# Altium PCB Arduino_DUE_V02b_Template.PcbDoc
Units mil, origin at the board's own origin, x right, y up, seen from the top; angles counter-clockwise.
Board outline 4000 x 2100 mil, 2 copper layers (Top Layer, Bottom Layer); 9 components, 86 nets, 104 pads, 0 vias.
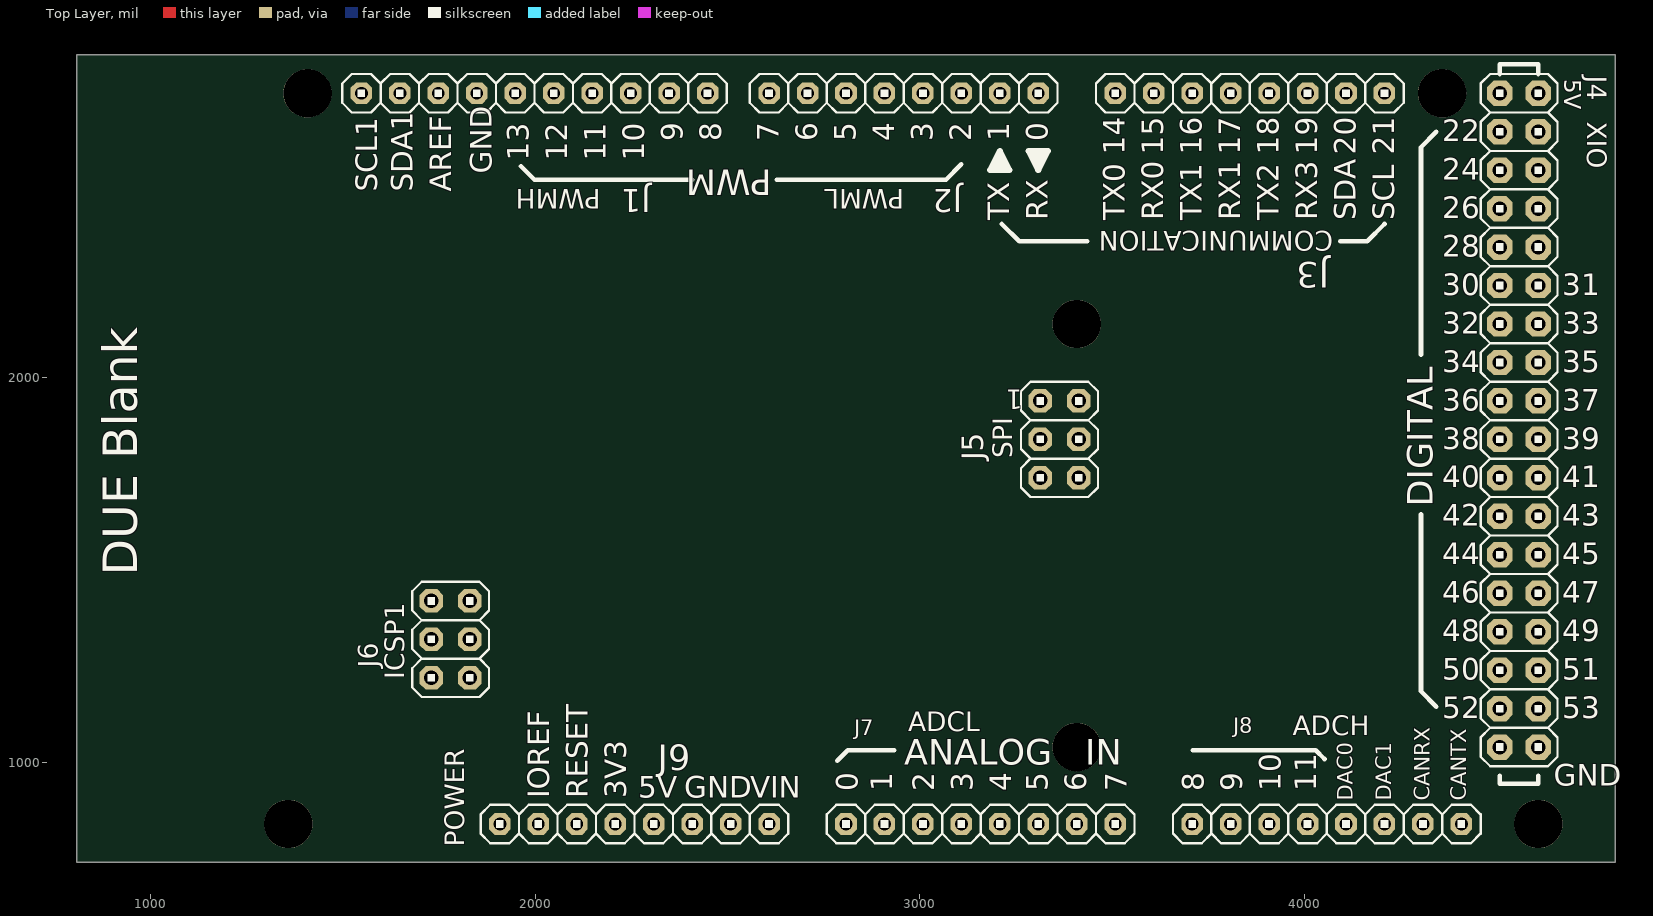
[diagram p0: Top Layer view]
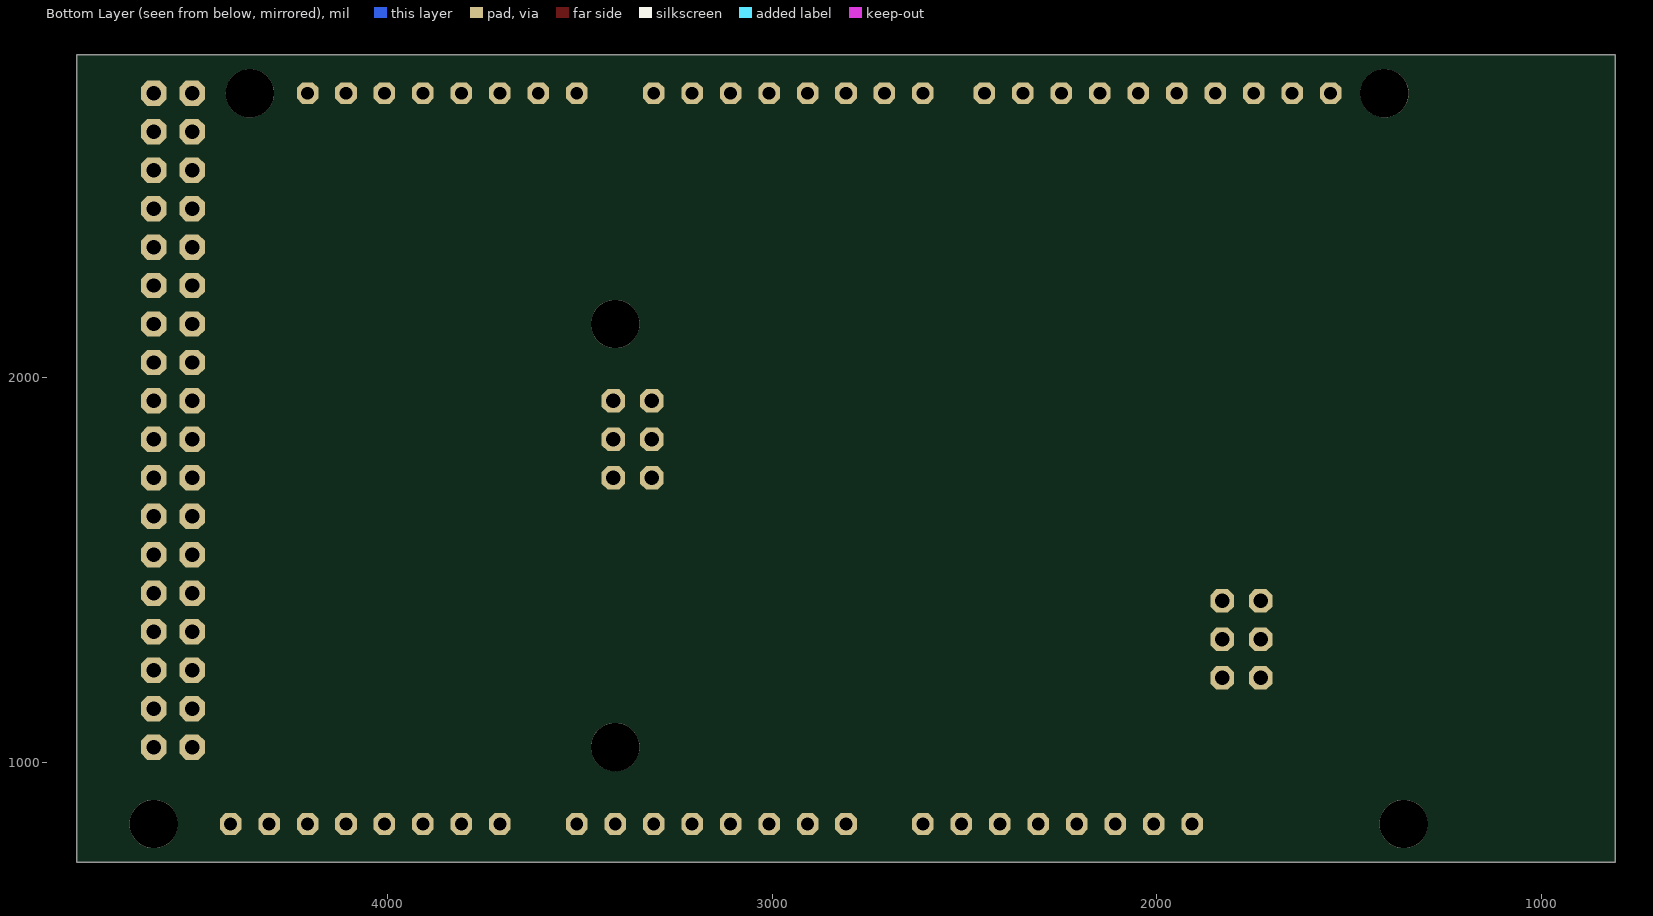
[diagram p1: Bottom Layer view, seen from below]

## Layer stack, top to bottom
Top Layer: signal copper 1.4
Dielectric: dielectric 12.6, FR-4, Dk 4.8
Bottom Layer: signal copper 1.4

## Board outline
807.98,739 4807.98,739 4807.98,2839 807.98,2839

## Design rules (kind name [scope] priority, off if disabled: settings)
AssemblyTestPointUsage [All] p1 off:
AssemblyTestpoint [All] p1 off: testpointundercomponent=TRUE minsize=40 maxsize=100 preferedsize=60 minholesize=0 maxholesize=40 preferedholesize=32 testpointgrid=1 usegrid=TRUE gridtolerance=0.01 allowsidetop=TRUE allowsidebottom=TRUE
Clearance [All] p1: gap=4
PolygonConnect [All] p1: connectstyle=Relief reliefconductorwidth=10 reliefentries=4 polygonreliefangle="90 Angle" airgapwidth=10
RoutingVias [All] p1: holewidth=28 width=50 viastyle="Through Hole" minholewidth=28 minwidth=50 maxholewidth=28 maxwidth=50
SolderMaskExpansion [All] p1: expansion=4
Width [All] p1: maxlimit=10 minlimit=10 preferedwidth=10
26 further rules are at their usual default settings.

## Components (designator, comment, footprint, x,y, rotation, side; value= is the part's Value field where it differs from the comment)
J1 "PWMH" 1X10 1997.98,2739 r180 top locked
J2 "PWML" 1X08 2957.98,2739 r180 top locked
J3 "COMMUNICATION" 1X08 3857.98,2739 r0 top locked
J4 "XIO" 2X18 4557.98,1889 r270 top locked
J5 "SPI" 2X03 3362.98,1839 r270 top locked
J6 "ICSP1" 2X03 1779.98,1319 r90 top locked
J7 "ADCL" 1X08 3157.98,839 r0 top locked
J8 "ADCH" 1X08 4057.98,839 r0 top locked
J9 "POWER" 1X08 2257.98,839 r0 top locked

## Footprints (in the part's own frame and the unit in brackets; to place one, negate y for a bottom-side part, rotate by r counter-clockwise, add the part's x,y. Pads: shape width x height; smd on the part's side, far side on the other; paste and mask are expansions set on the pad)
1X08 [mil]
  oct 56x56 hole 33.46: 1(-350,0) 2(-250,0) 3(-150,0) 4(-50,0) 5(50,0) 6(150,0) 7(250,0) 8(350,0)
  silkscreen extent -400,-50 400,50
1X10 [mil]
  oct 56x56 hole 33.46: 1(-450,0) 2(-350,0) 3(-250,0) 4(-150,0) 5(-50,0) 6(50,0) 7(150,0) 8(250,0) 9(350,0) 10(450,0)
  silkscreen extent -500,-50 500,50
2X03 [mm]
  oct 1.55x1.55 hole 0.95: 1(-2.54,-1.27) 2(-2.54,1.27) 3(0,-1.27) 4(0,1.27) 5(2.54,-1.27) 6(2.54,1.27)
  silkscreen extent -3.81,-2.54 3.81,2.54
2X18 [mil]
  oct 66x66 hole 37.4: 1(-850,-50) 2(-850,50) 3(-750,-50) 4(-750,50) 5(-650,-50) 6(-650,50) 7(-550,-50) 8(-550,50) 9(-450,-50) 10(-450,50) 11(-350,-50) 12(-350,50) 13(-250,-50) 14(-250,50) 15(-150,-50) 16(-150,50) 17(-50,-50) 18(-50,50) 19(50,-50) 20(50,50) 21(150,-50) 22(150,50) 23(250,-50) 24(250,50) 25(350,-50) 26(350,50) 27(450,-50) 28(450,50) 29(550,-50) 30(550,50) 31(650,-50) 32(650,50) 33(750,-50) 34(750,50) 35(850,-50) 36(850,50)
  silkscreen extent -900,-100 900,100

## Part data
J1: library part PINHD-1X10
J2 J3 J7 J8 J9: library part PINHD-1X8
J4: library part PINHD-2X18
J5 J6: library part PINHD-2X3

## Free pads (board coordinates)
  round 125.98 hole 125.98 unplated: ""(1357.98,839) ""(1407.98,2739) ""(3407.98,1039) ""(3407.98,2139) ""(4357.98,2739) ""(4607.98,839)

## Nets (pads, with @x,y where several pads share a name; then routed paths per layer and width w, separated by ;. In a path a pad name is that pad's centre, name@x,y a point inside that pad or via, vN(x,y) a via of type N, cw(c..) or ccw(c..) an arc to the next point about the centre after c; other vN are vias at no path point)
+3V3: J9.2 J9.4
+5V: J4.1 J4.2 J5.2 J6.2 J9.5
AD0: J7.1
AD1: J7.2
AD2: J7.3
AD3: J7.4
AD4: J7.5
AD5: J7.6
AD6: J7.7
AD7: J7.8
AD8: J8.1
AD9: J8.2
AD10: J8.3
AD11(TXD3): J8.4
AD14(RXD3): J4.33
AREF: J1.8
CANRX0: J8.7
CANTX0: J8.8
CANTX1/IO: J4.34
DAC0(CANRX1): J8.5
DAC1: J8.6
GND: J1.7 J4.35 J4.36 J5.6 J6.6 J9.6 J9.7
MASTER-RESET: J5.5 J9.3
MISO: J5.1
MISO2: J6.1
MOSI: J5.4
MOSI2: J6.4
NetJ9_1: J9.1
PIN22: J4.3
PIN23: J4.4
PIN24: J4.5
PIN25: J4.6
PIN26: J4.7
PIN27: J4.8
PIN28: J4.9
PIN29: J4.10
PIN30: J4.11
PIN31: J4.12
PIN32: J4.13
PIN33: J4.14
PIN34: J4.15
PIN35: J4.16
PIN36: J4.17
PIN37: J4.18
PIN38: J4.19
PIN39: J4.20
PIN40: J4.21
PIN41: J4.22
PIN42: J4.23
PIN43: J4.24
PIN44: J4.25
PIN45: J4.26
PIN46: J4.27
PIN47: J4.28
PIN48: J4.29
PIN49: J4.30
PIN50: J4.31
PIN51: J4.32
PWM2: J2.3
PWM3: J2.4
PWM5: J2.6
PWM6: J2.7
PWM7: J2.8
PWM8: J1.1
PWM9: J1.2
PWM11: J1.4
PWM12: J1.5
PWM13: J1.6
RESET2: J6.5
RX: J2.1
RXD0: J3.2
RXD1: J3.4
RXD2: J3.6
SCK2: J6.3
SCL0-3: J3.8
SCL1: J1.10
SDA0-3: J3.7
SDA1: J1.9
SPCK: J5.3
SS0/PWM10: J1.3
SS1/PWM4: J2.5
TX: J2.2
TXD0: J3.1
TXD1: J3.3
TXD2: J3.5
VIN: J9.8

## Silkscreen, mask and mechanical layers (free items; w line width, h text height)
Top Overlay:
  lines w12: 1962.98,2549 1997.98,2514 2407.98,2514 ; 2627.98,2514 3067.98,2514 3107.98,2554 ; 2784.98,1003 2812.98,1031 2932.98,1031 ; 3212.98,2399 3257.98,2354 3435,2354 ; 3710,1031 4028.98,1031 4051.98,1008 ; 4092.98,2354 4162.98,2354 4207.98,2399 ; 4302.98,1644 4302.98,1184 4342.98,1144 ; 4302.98,2059 4302.98,2599 4342.98,2639 ; 4507.98,964 4507.98,944 4607.98,944 4607.98,964 ; 4507.98,2789 4507.98,2814 4607.98,2814 4607.98,2789
  lines w16: 3182.98,2539 3207.98,2589 3232.98,2539 ; 3182.98,2539 3207.98,2539 ; 3182.98,2539 3207.98,2564 ; 3207.98,2539 3207.98,2564 ; 3207.98,2539 3232.98,2539 ; 3207.98,2564 3232.98,2539 ; 3282.98,2589 3307.98,2589 ; 3282.98,2589 3307.98,2539 3332.98,2589 ; 3282.98,2589 3307.98,2564 ; 3307.98,2564 3332.98,2589 ; 3307.98,2564 3307.98,2589 ; 3307.98,2589 3332.98,2589
  text "5V" at 4675,2775 h44 r270
  text "9" at 2382.98,2614 h56 r90
  text "8" at 2482.98,2614 h56 r90
  text "7" at 2632.98,2614 h56 r90
  text "6" at 2732.98,2614 h56 r90
  text "5" at 2832.98,2614 h56 r90
  text "4" at 2932.98,2614 h56 r90
  text "3" at 3032.98,2614 h56 r90
  text "2" at 3132.98,2614 h56 r90
  text "1" at 3232.98,2614 h56 r90
  text "0" at 3332.98,2614 h56 r90
  text "22" at 4357.98,2614 h56
  text "14" at 3532.98,2579 h56 r90
  text "15" at 3632.98,2579 h56 r90
  text "16" at 3732.98,2579 h56 r90
  text "17" at 3832.98,2579 h56 r90
  text "18" at 3932.98,2579 h56 r90
  text "19" at 4032.98,2579 h56 r90
  text "20" at 4132.98,2579 h56 r90
  text "21" at 4232.98,2579 h56 r90
  text "13" at 1982.98,2564 h56 r90
  text "12" at 2082.98,2564 h56 r90
  text "11" at 2182.98,2564 h56 r90
  text "10" at 2282.98,2564 h56 r90
  text "PWM" at 2615,2540 h66 r180
  text "GND" at 1887.23,2529.48 h56 r90
  text "24" at 4357.98,2514 h56
  text "SCL1" at 1589.81,2482.48 h56 r90
  text "SDA1" at 1681.81,2482.48 h56 r90
  text "AREF" at 1781.81,2482.48 h56 r90
  text "26" at 4357.98,2414 h56
  text "TX" at 3232.98,2409 h56 r90
  text "RX" at 3332.98,2409 h56 r90
  text "TX0" at 3532.98,2409 h56 r90
  text "RX0" at 3632.98,2409 h56 r90
  text "TX1" at 3732.98,2409 h56 r90
  text "RX1" at 3832.98,2409 h56 r90
  text "TX2" at 3932.98,2409 h56 r90
  text "RX3" at 4032.98,2409 h56 r90
  text "SDA" at 4132.98,2409 h56 r90
  text "SCL" at 4232.98,2409 h56 r90
  text "28" at 4357.98,2314 h56
  text "30" at 4357.98,2214 h56
  text "31" at 4670,2214 h56
  text "32" at 4357.98,2114 h56
  text "33" at 4670,2114 h56
  text "34" at 4357.98,2014 h56
  text "35" at 4670,2014 h56
  text "1" at 3267.65,1968.52 h50 r180
  text "36" at 4357.98,1914 h56
  text "37" at 4670,1914 h56
  text "38" at 4357.98,1814 h56
  text "39" at 4670,1814 h56
  text "40" at 4357.98,1714 h56
  text "41" at 4670,1714 h56
  text "DIGITAL" at 4332.98,1664 h66 r90
  text "42" at 4357.98,1614 h56
  text "43" at 4670,1614 h56
  text "44" at 4357.98,1514 h56
  text "45" at 4670,1514 h56
  text "DUE Blank" at 965,1485 h90 r90
  text "46" at 4357.98,1414 h56
  text "47" at 4670,1414 h56
  text "48" at 4357.98,1314 h56
  text "49" at 4670,1314 h56
  text "50" at 4357.98,1214 h56
  text "51" at 4670,1214 h56
  text "52" at 4357.98,1114 h56
  text "53" at 4670,1114 h56
  text "ANALOG   IN" at 2958.98,993 h66
  text "GND" at 4647.98,939 h56
  text "0" at 2837.98,924 h56 r90
  text "1" at 2927.98,924 h56 r90
  text "2" at 3037.98,924 h56 r90
  text "3" at 3137.98,924 h56 r90
  text "4" at 3237.98,924 h56 r90
  text "5" at 3332.98,924 h56 r90
  text "6" at 3432.98,924 h56 r90
  text "7" at 3537.98,924 h56 r90
  text "8" at 3737.98,924 h56 r90
  text "9" at 3837.98,924 h56 r90
  text "10" at 3937.98,924 h56 r90
  text "11" at 4029.98,924 h56 r90
  text "5V" at 2267.46,907.17 h56
  text "GND" at 2387.46,907.17 h56
  text "VIN" at 2559.46,907.17 h56
  text "IOREF" at 2036.81,906.48 h56 r90
  text "RESET" at 2136.81,906.48 h56 r90
  text "3V3" at 2236.81,906.48 h56 r90
  text "DAC0" at 4125.98,900 h40 r90
  text "DAC1" at 4225.98,900 h40 r90
  text "CANRX" at 4325.98,900 h40 r90
  text "CANTX" at 4420.98,900 h40 r90
Mechanical 1:
  the board outline again, w10
Mechanical 20:
  lines w10: 1221.96,839 1357.98,839 1357.98,702.98 ; 1271.96,2739 1407.98,2739 1407.98,2602.98 ; 3271.96,2139 3407.98,2139 3407.98,2002.98 ; 3407.98,1175.02 3407.98,1039 3544,1039 ; 4221.96,2739 4357.98,2739 4357.98,2602.98 ; 4471.96,839 4607.98,839 4607.98,702.98 ; 4670,2329 4807.98,2229 4807.98,939 4707.98,839 4707.98,778.37 cw(c4668.61,778.37) 4668.61,739 847.35,739 cw(c847.35,778.37) 807.98,778.37 807.98,2799.63 cw(c847.35,2799.63) 847.35,2839 4647.98,2839 4707.98,2779 4707.98,2329